# EAGLE board pcb l4 v26 (EAGLE 9.7.0)
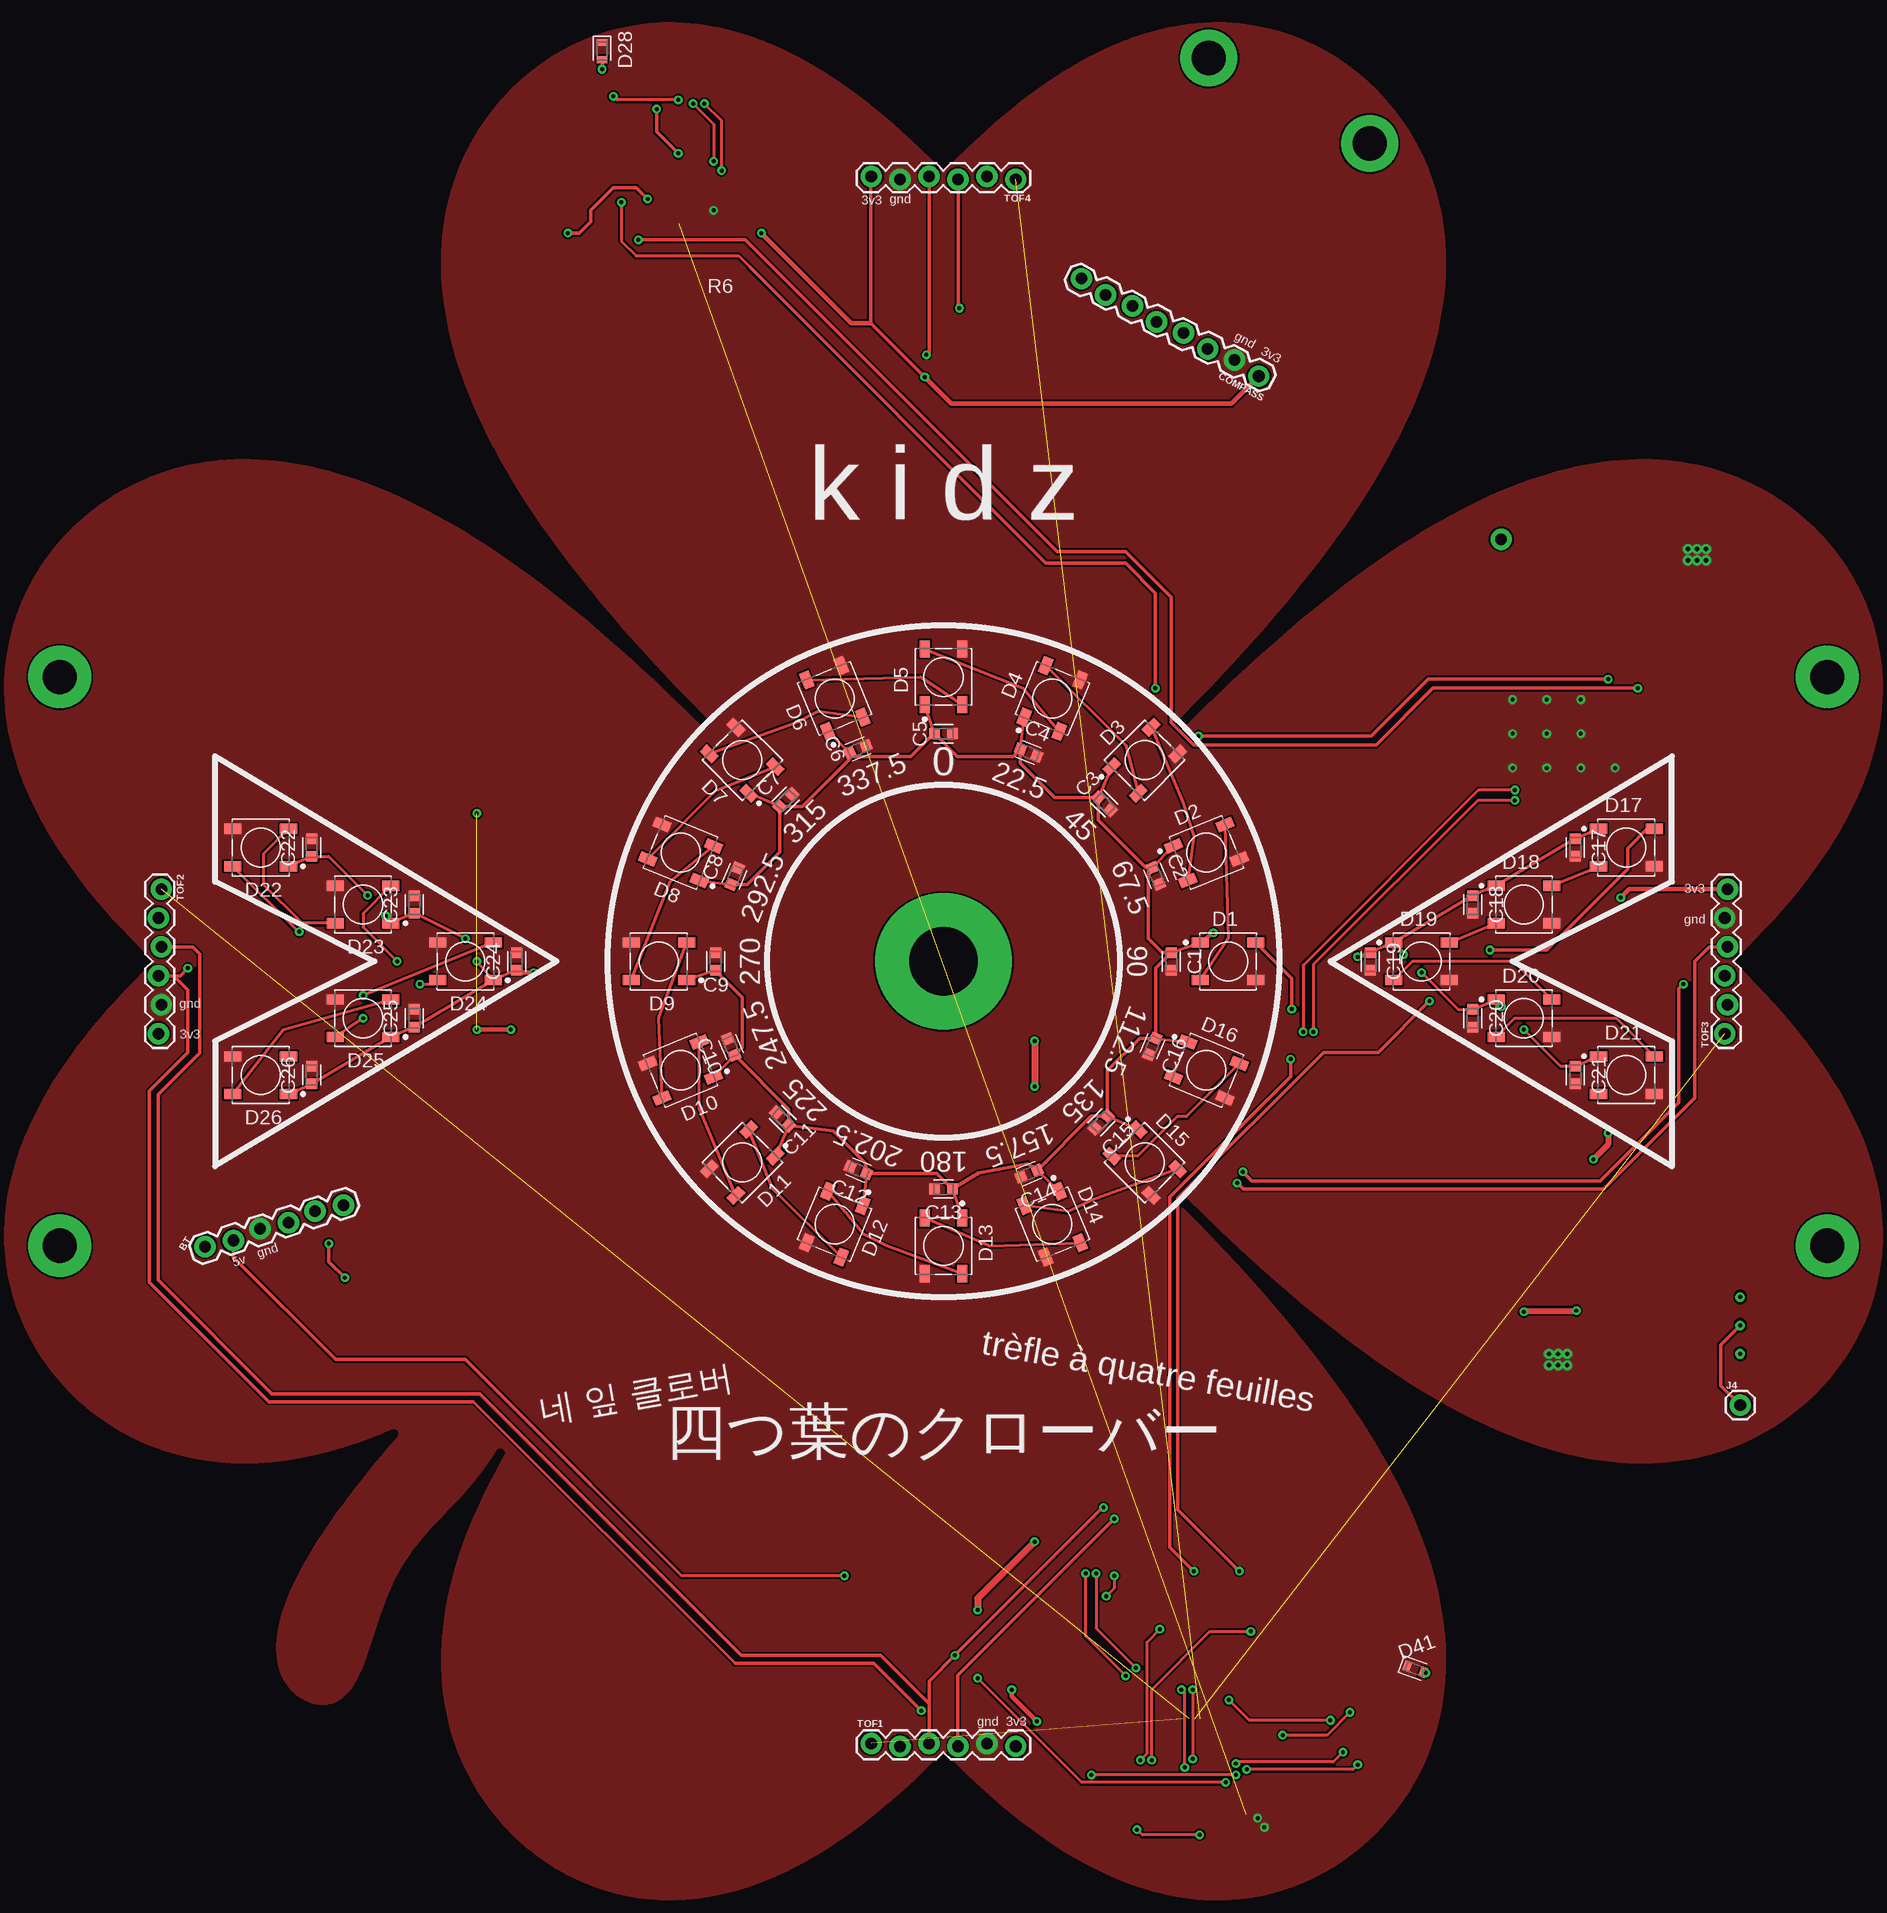
[diagram p0: board, top side]
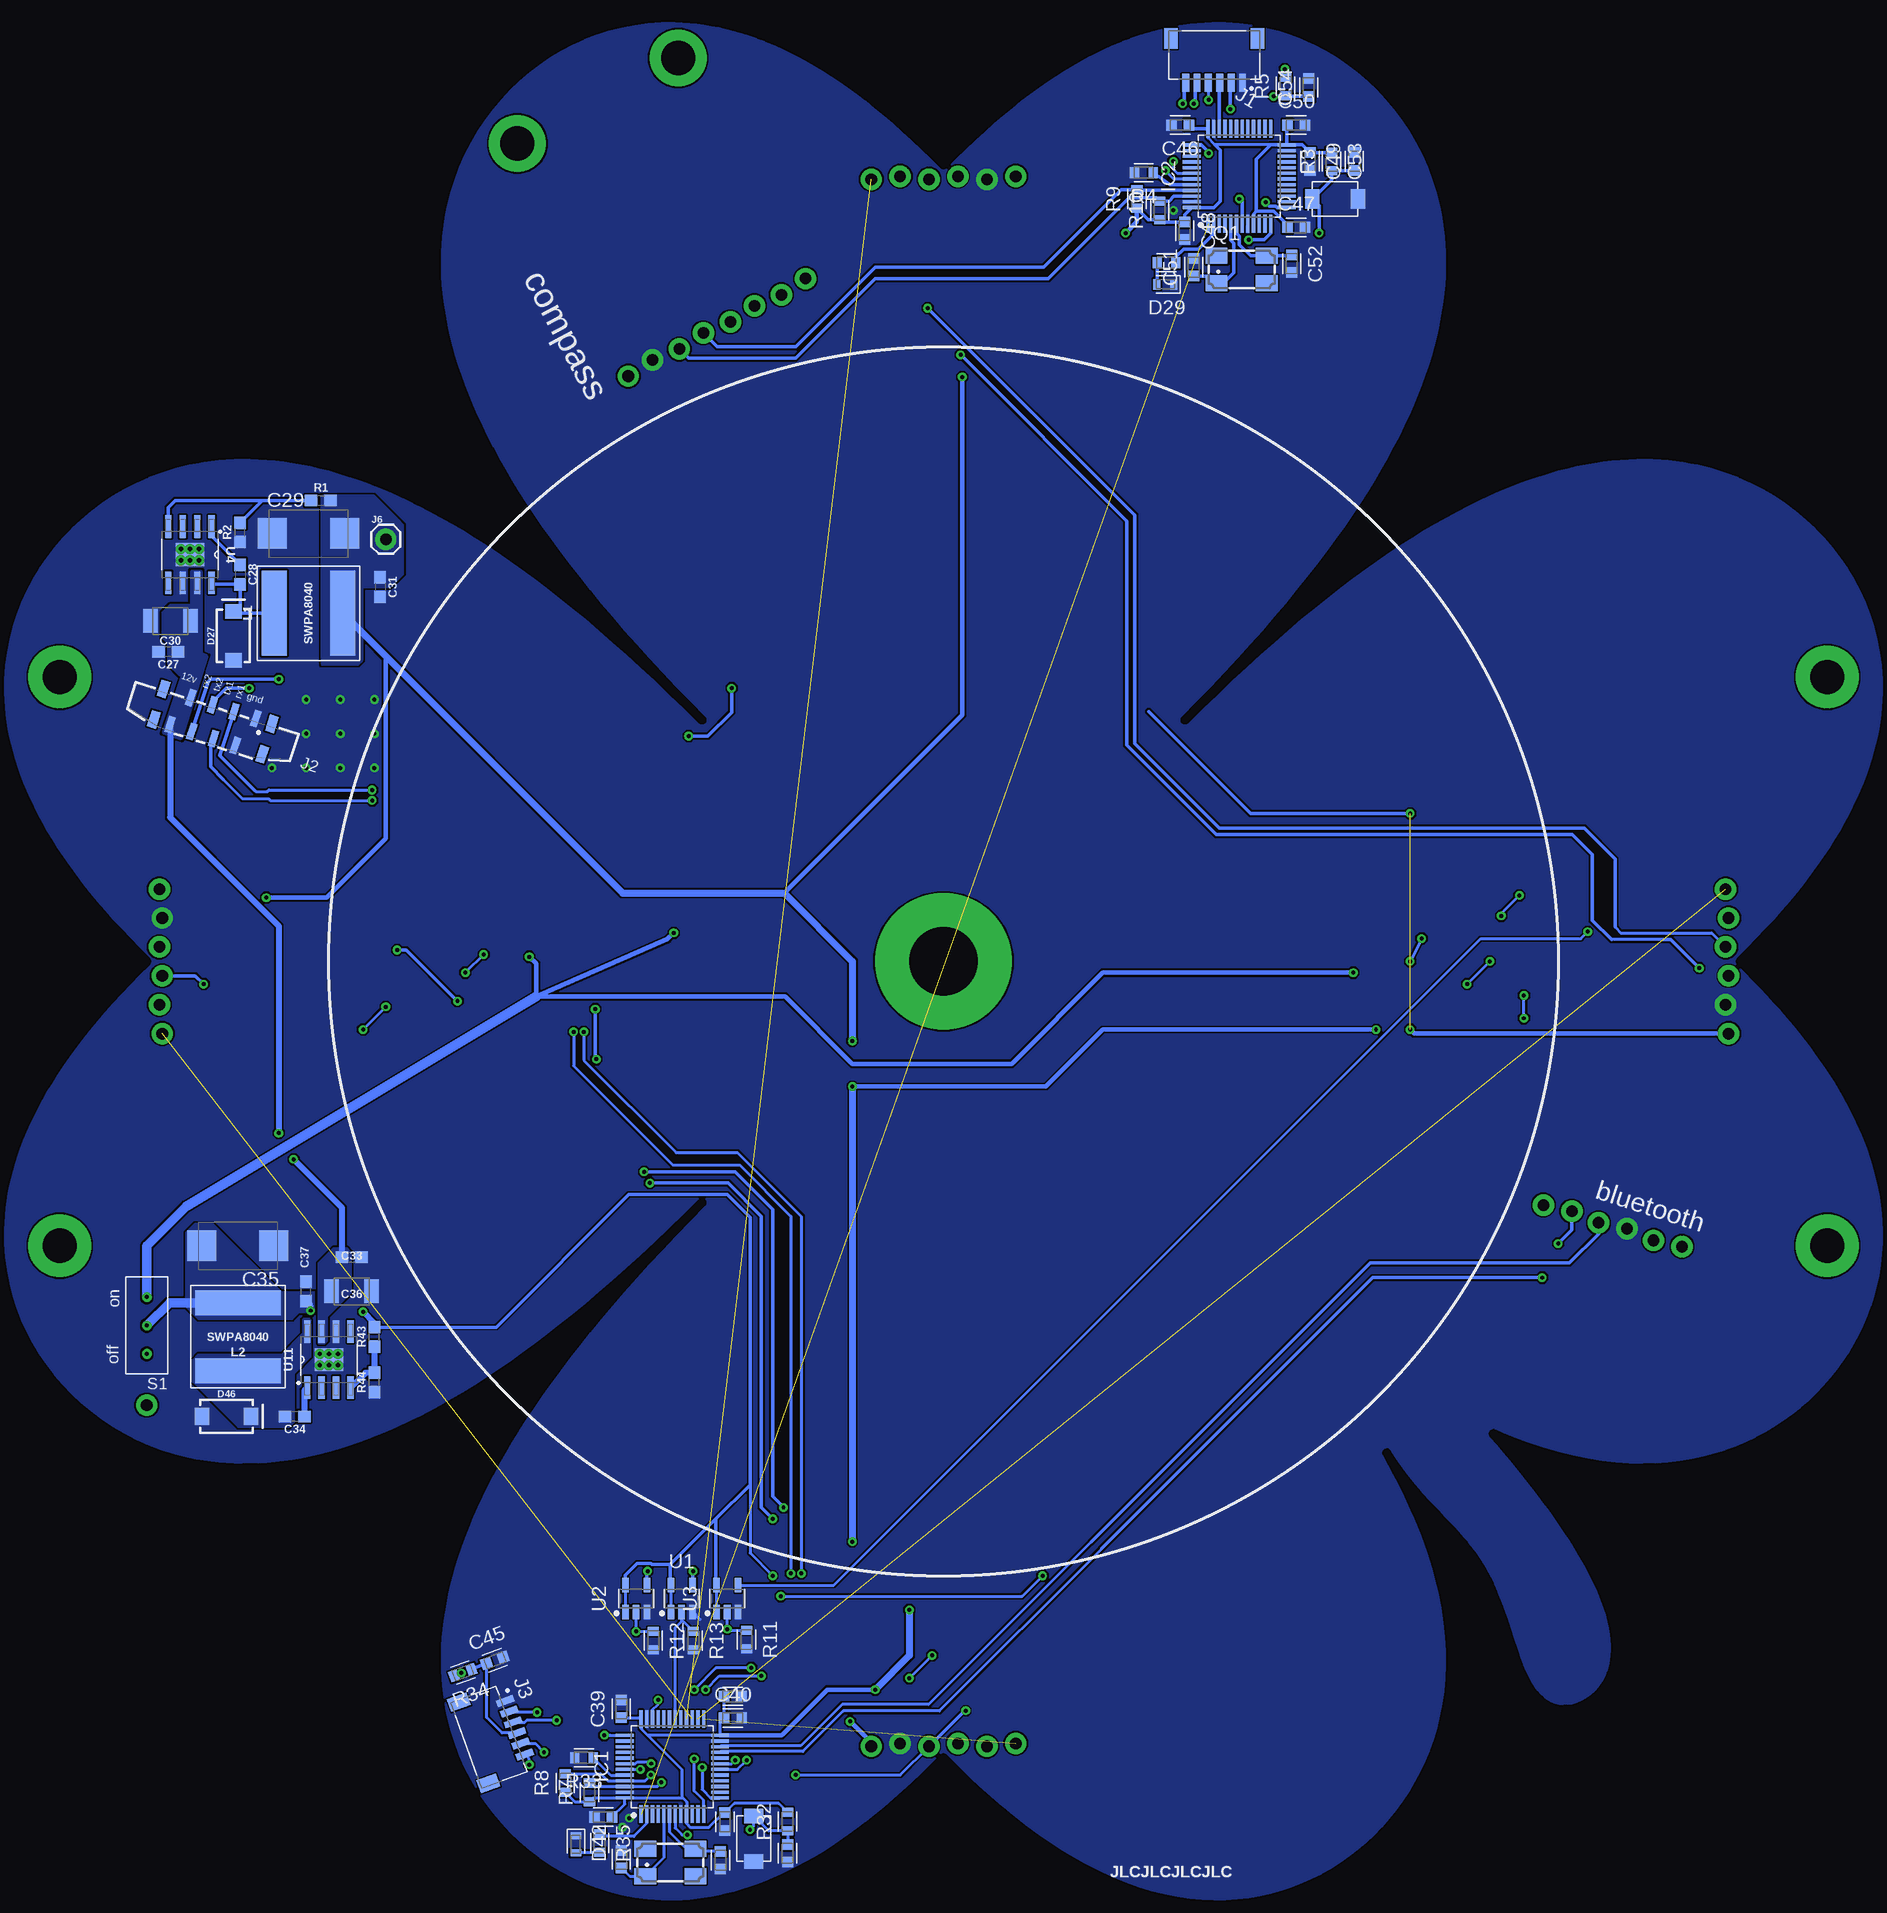
[diagram p1: board, bottom side, seen from below]

No outline drawn. Coordinates in mm, seen from the top.
Copper layers (1*16): Top / Bottom
Stack-up Default Layer Stack: Top User Defined 0.035mm / Dielectric-1 User Defined 1.5mm / Bottom User Defined 0.035mm
Design rules: minimum copper width 6mil, minimum drill size 0.35mm, copper clearance wire_polygon to wire_polygon 6mil, copper clearance wire_polygon to pad_smd 6mil, copper clearance wire_polygon to via 6mil, copper clearance pad_smd to pad_smd 6mil, copper clearance pad_smd to via 6mil, copper clearance via to via 6mil, copper clearance smd to pad (same net) 6mil, copper clearance smd to via (same net) 6mil, copper clearance smd to smd (same net) 6mil, dimension clearance 0.35mm, restrict clearance 0mil, drill distance 6mil, keepout clearance 0mil

## Footprints (pad centres in the part's own frame; a part is rotated, then mirrored left to right if it is on the bottom)
1X06_LOCK = drill 1.016 pad 1.88: 1 0,0; 2 2.54,-0.254; 3 5.08,0; 4 7.62,-0.254; 5 10.16,0; 6 12.7,-0.254
CAPC1608X85 = smd 0.921 x 0.97: 1 -0.775,0; 2 0.775,0
C0603 = smd 1.1 x 1: 1 -0.85,0; 2 0.85,0
D/7343-31R = smd 2.55 x 2.7: + 3.175,0; - -3.175,0
C1210 = smd 1.27 x 2.06: 1 -1.755,0; 2 1.755,0
1X08_LOCK = drill 1.016 pad 1.88: 1 0,0.127; 2 2.54,-0.127; 3 5.08,0.127; 4 7.62,-0.127; 5 10.16,0.127; 6 12.7,-0.127; 7 15.24,0.127; 8 17.78,-0.127
WS2812B = smd 1.5 x 0.9: 1 -2.45,1.65; 2 -2.45,-1.65; 3 2.45,-1.65; 4 2.45,1.65
SMA-DIODE = smd 1.27 x 1.47: A -2.15,0; C 2.15,0
LEDC1608X35N_FLAT-G = smd 0.612 x 0.912: A 0.75,0; C -0.75,0
QFP50P900X900X160-48N = smd 1.559 x 0.28: 1 -4.178,2.75; 2 -4.178,2.25; 3 -4.178,1.75; 4 -4.178,1.25; 5 -4.178,0.75; 6 -4.178,0.25; 7 -4.178,-0.25; 8 -4.178,-0.75; 9 -4.178,-1.25; 10 -4.178,-1.75; 11 -4.178,-2.25; 12 -4.178,-2.75; 25 4.178,-2.75; 26 4.178,-2.25; 27 4.178,-1.75; 28 4.178,-1.25; 29 4.178,-0.75; 30 4.178,-0.25; 31 4.178,0.25; 32 4.178,0.75; 33 4.178,1.25; 34 4.178,1.75; 35 4.178,2.25; 36 4.178,2.75 | smd 0.28 x 1.559: 13 -2.75,-4.178; 14 -2.25,-4.178; 15 -1.75,-4.178; 16 -1.25,-4.178; 17 -0.75,-4.178; 18 -0.25,-4.178; 19 0.25,-4.178; 20 0.75,-4.178; 21 1.25,-4.178; 22 1.75,-4.178; 23 2.25,-4.178; 24 2.75,-4.178; 37 2.75,4.178; 38 2.25,4.178; 39 1.75,4.178; 40 1.25,4.178; 41 0.75,4.178; 42 0.25,4.178; 43 -0.25,4.178; 44 -0.75,4.178; 45 -1.25,4.178; 46 -1.75,4.178; 47 -2.25,4.178; 48 -2.75,4.178
JST_SM06B-SRSS-TB(LF)(SN) = smd 0.6 x 1.55: 1 -2.5,0; 2 -1.5,0; 3 -0.5,0; 4 0.5,0; 5 1.5,0; 6 2.5,0 | smd 1.2 x 1.8: S1 -3.8,-3.875; S2 3.8,-3.875
686108183822 = smd 0.6 x 1.5: 1 -3.5,-1.8; 2 -2.5,1; 3 -1.5,-1.8; 4 -0.5,1; 5 0.5,-1.8; 6 1.5,1; 7 2.5,-1.8; 8 3.5,1 | smd 0.8 x 1.5: Z1 -5,-1.8; Z2 -5,1; Z3 5,-1.8; Z4 5,1
1X01 = drill 1.016 pad 1.88: 1 0,0
SWPA8040 = smd 2.2 x 7.5: P1 -3,0; P2 3,0
CTS406 = smd 1.9 x 1.4: 1 -2.2,-1.2; 2 2.2,-1.2; 3 2.2,1.2; 4 -2.2,1.2
R0603 = smd 1.1 x 1: 1 -0.85,0; 2 0.85,0
RESC1608X60 = smd 0.799 x 0.974: 1 -0.815,0; 2 0.815,0
SWITCH-TH = drill 0.33 slot 0.53: P$1 -2.5,0; P$2 0,0; P$3 2.5,0
SOT23-5 = smd 1.267 x 0.577: 1 -1.175,0.95; 2 -1.175,0; 3 -1.175,-0.95; 4 1.175,-0.95; 5 1.175,0.95
POWERPAD-SOIC-8 = smd 1.981 x 0.559: 1 -2.464,1.905; 2 -2.464,0.635; 3 -2.464,-0.635; 4 -2.464,-1.905; 5 2.464,-1.905; 6 2.464,-0.635; 7 2.464,0.635; 8 2.464,1.905 | smd 2.007 x 2.489: 9 0,0 | drill 0.381: P$1 -0.5,0.8; P$2 0.5,0.8; P$3 -0.5,0; P$4 0.5,0; P$5 -0.5,-0.8; P$6 0.5,-0.8
SMOL_TACTILE_3X4MM = smd 1.27 x 1.676: P$1 2,0; P$2 -2,0

## Placement (x,y rotation side)
BT  [1X06_LOCK]  -64.88,-25.06 17.8 top
C1  0.1 uf  [CAPC1608X85]  20,0 270 top
C2  0.1 uf  [CAPC1608X85]  18.65,7.52 292.5 top
C3  0.1 uf  [CAPC1608X85]  14.14,13.86 315 top
C4  0.1 uf  [CAPC1608X85]  7.48,18.35 337.5 top
C5  0.1 uf  [CAPC1608X85]  0,20 0 top
C6  0.1 uf  [CAPC1608X85]  -7.52,18.65 22.5 top
C7  0.1 uf  [CAPC1608X85]  -13.86,14.14 45 top
C8  0.1 uf  [CAPC1608X85]  -18.35,7.48 67.5 top
C9  0.1 uf  [CAPC1608X85]  -20,0 90 top
C10  0.1 uf  [CAPC1608X85]  -18.65,-7.52 112.5 top
C11  0.1 uf  [CAPC1608X85]  -14.14,-13.86 135 top
C12  0.1 uf  [CAPC1608X85]  -7.48,-18.35 157.5 top
C13  0.1 uf  [CAPC1608X85]  0,-20 180 top
C14  0.1 uf  [CAPC1608X85]  7.52,-18.65 202.5 top
C15  0.1 uf  [CAPC1608X85]  13.86,-14.14 225 top
C16  0.1 uf  [CAPC1608X85]  18.35,-7.48 247.5 top
C17  0.1 uf  [CAPC1608X85]  55.5,10 270 top
C18  0.1 uf  [CAPC1608X85]  46.5,5 270 top
C19  0.1 uf  [CAPC1608X85]  37.5,0 270 top
C20  0.1 uf  [CAPC1608X85]  46.5,-5 270 top
C21  0.1 uf  [CAPC1608X85]  55.5,-10 270 top
C22  0.1 uf  [CAPC1608X85]  -55.5,10 90 top
C23  0.1 uf  [CAPC1608X85]  -46.5,5 90 top
C24  0.1 uf  [CAPC1608X85]  -37.5,0 90 top
C25  0.1 uf  [CAPC1608X85]  -46.5,-5 90 top
C26  0.1 uf  [CAPC1608X85]  -55.5,-10 90 top
C27  4.7uF  [C0603]  68.1,27.2 180 bottom
C28  10.0nF  [C0603]  61.8,34 270 bottom
C29  220uF  [D/7343-31R]  55.8,37.6 0 bottom
C30  22.0uF  [C1210]  67.93,29.92 180 bottom
C31  0.1uF  [C0603]  49.5,32.9 270 bottom
C32  0.1 uf  [CAPC1608X85]  19.2,-75.6 270 bottom
C33  4.7uF  [C0603]  52,-26 0 bottom
C34  10.0nF  [C0603]  57,-40 180 bottom
C35  220uF  [D/7343-31R]  62,-25 180 bottom
C36  22.0uF  [C1210]  52,-29 0 bottom
C37  0.1uF  [C0603]  56,-29 90 bottom
C38  0.1 uf  [CAPC1608X85]  29.9,-75.2 180 bottom
C39  0.1 uf  [CAPC1608X85]  28.3,-65.7 90 bottom
C40  0.1 uf  [CAPC1608X85]  18.5,-66.5 0 bottom
C41  4.7 uf  [CAPC1608X85]  18.5,-64.6 0 bottom
C42  20 pf  [CAPC1608X85]  28.3,-78.9 90 bottom
C43  20pf  [CAPC1608X85]  19.6,-79 270 bottom
C44  0.1uf  [CAPC1608X85]  13.7,-78.4 90 bottom
C45  0.1 uF  [CAPC1608X85]  39.42,-61.43 20 bottom
C46  0.1 uF  [CAPC1608X85]  -20.8,73.5 180 bottom
C47  0.1 uF  [CAPC1608X85]  -31,64.5 0 bottom
C48  0.1 uF  [CAPC1608X85]  -21.2,64.2 270 bottom
C49  0.1 uF  [CAPC1608X85]  -32.2,70.3 270 bottom
C50  4.7 uF  [CAPC1608X85]  -31,73.5 0 bottom
C51  20 pF  [CAPC1608X85]  -22,61 90 bottom
C52  20 pF  [CAPC1608X85]  -30.6,61.3 270 bottom
C53  0.1 uF  [CAPC1608X85]  -36.08,70.3 270 bottom
C54  0.1 uF  [CAPC1608X85]  -32.1,76.8 90 bottom
COMPASS  [1X08_LOCK]  27.76,51.54 152 top
D1  WS2812B  [WS2812B]  25,0 0 top
D2  WS2812B  [WS2812B]  23.1,9.57 22.5 top
D3  WS2812B  [WS2812B]  17.68,17.68 45 top
D4  WS2812B  [WS2812B]  9.57,23.1 67.5 top
D5  WS2812B  [WS2812B]  0,25 90 top
D6  WS2812B  [WS2812B]  -9.57,23.1 112.5 top
D7  WS2812B  [WS2812B]  -17.68,17.68 135 top
D8  WS2812B  [WS2812B]  -23.1,9.57 157.5 top
D9  WS2812B  [WS2812B]  -25,0 180 top
D10  WS2812B  [WS2812B]  -23.1,-9.57 202.5 top
D11  WS2812B  [WS2812B]  -17.68,-17.68 225 top
D12  WS2812B  [WS2812B]  -9.57,-23.1 247.5 top
D13  WS2812B  [WS2812B]  0,-25 270 top
D14  WS2812B  [WS2812B]  9.57,-23.1 292.5 top
D15  WS2812B  [WS2812B]  17.68,-17.68 315 top
D16  WS2812B  [WS2812B]  23.1,-9.57 337.5 top
D17  WS2812B  [WS2812B]  60,10 0 top
D18  WS2812B  [WS2812B]  51,5 0 top
D19  WS2812B  [WS2812B]  42,0 0 top
D20  WS2812B  [WS2812B]  51,-5 0 top
D21  WS2812B  [WS2812B]  60,-10 0 top
D22  WS2812B  [WS2812B]  -60,10 180 top
D23  WS2812B  [WS2812B]  -51,5 180 top
D24  WS2812B  [WS2812B]  -42,0 180 top
D25  WS2812B  [WS2812B]  -51,-5 180 top
D26  WS2812B  [WS2812B]  -60,-10 180 top
D27  3A/40V/500mV  [SMA-DIODE]  62.38,28.6 90 bottom
D28  [LEDC1608X35N_FLAT-G]  -30,80 270 top
D29  [LEDC1608X35N_FLAT-G]  -19.5,59.5 180 bottom
D41  [LEDC1608X35N_FLAT-G]  41.44,-62.2 340 top
D42  [LEDC1608X35N_FLAT-G]  32.3,-77.6 270 bottom
D46  3A/40V/500mV  [SMA-DIODE]  63,-40 0 bottom
IC1  [QFP50P900X900X160-48N]  23.82,-70.77 90 bottom
IC2  [QFP50P900X900X160-48N]  -25.99,69 90 bottom
J1  [JST_SM06B-SRSS-TB(LF)(SN)]  -23.78,77.21 180 bottom
J2  686108183822  [686108183822]  64.31,20.69 162.2 bottom
J3  [JST_SM06B-SRSS-TB(LF)(SN)]  37.65,-67.34 290 bottom
J4  [1X01]  70,-39 0 top
J6  [1X01]  49,37.1 0 bottom
L1  SWPA8040/10uH  [SWPA8040]  55.8,30.6 0 bottom
L2  SWPA8040/10uH  [SWPA8040]  62,-33 90 bottom
Q1  8Mhz  [CTS406]  -26.2,60.8 0 bottom
Q26  8mhz  [CTS406]  24,-79.2 0 bottom
R1  10k  [R0603]  54.7,40.5 0 bottom
R2  3.24k  [R0603]  61.8,37.7 90 bottom
R3  10k  [RESC1608X60]  -34.1,70.3 90 bottom
R4  10k  [RESC1608X60]  -17.6,69.3 180 bottom
R5  .39  [RESC1608X60]  -30.06,76.9 90 bottom
R6  .39  [RESC1608X60]  -19.6,61.4 180 bottom
R7  10k  [RESC1608X60]  31.1,-73.03 90 bottom
R8  10k  [RESC1608X60]  33.23,-72.2 90 bottom
R9  10k  [RESC1608X60]  -17,67 90 bottom
R10  10k  [RESC1608X60]  -19,66 90 bottom
R11  10k  [RESC1608X60]  17.3,-59.6 270 bottom
R12  10k  [RESC1608X60]  25.5,-59.7 270 bottom
R13  10k  [RESC1608X60]  22,-59.7 270 bottom
R32  10k  [RESC1608X60]  13.7,-75.6 90 bottom
R33  10k  [RESC1608X60]  31.58,-70 180 bottom
R34  .39  [RESC1608X60]  42.23,-62.51 200 bottom
R35  .39  [RESC1608X60]  30.2,-77.5 270 bottom
R43  10k  [R0603]  50,-33 90 bottom
R44  5.9k  [R0603]  50,-37 90 bottom
S1  SPDT-SLIDE-SWITCHSWITCH-TH  [SWITCH-TH]  70,-32 90 bottom
TOF1  [1X06_LOCK]  -6.35,-68.73 0 top
TOF2  [1X06_LOCK]  -68.72,6.35 270 top
TOF3  [1X06_LOCK]  68.64,-6.35 90 top
TOF4  [1X06_LOCK]  6.35,68.73 180 top
U1  SN74AHCT1G08  [SOT23-5]  23,-56 90 bottom
U2  SN74AHCT1G08  [SOT23-5]  27,-56 90 bottom
U3  SN74AHCT1G08  [SOT23-5]  19,-56 90 bottom
U4  TPS5430  [POWERPAD-SOIC-8]  66.2,35.74 270 bottom
U11  TPS5430  [POWERPAD-SOIC-8]  54,-35 90 bottom
U$1  [SMOL_TACTILE_3X4MM]  16.68,-77.1 270 bottom
U$2  [SMOL_TACTILE_3X4MM]  -34.4,67 0 bottom

## Library data of the parts
BT COMPASS J4 J6 TOF1-TOF4 = SparkFun-Connectors
C1-C26 C32 C38-C54 = Capacitor; CATEGORY: Capacitor
C27 C28 C30 C31 C33 C34 C36 C37 L1 L2 R1 R2 R43 R44 U4 U11 = JH
C29 C35 = rcl; SPICEPREFIX: C
D1-D26 = LED; CATEGORY: LED; COLOR: RGB; DESCRIPTION: LED integrated light source; MANUFACTURER: Worldsemi; MPN: WS2812B; OPERATING_TEMP: -25 ℃ to +80℃(TJ); PART_STATUS: Active; SUB_CATEGORY: RGB
D27 D46 = SparkFun-DiscreteSemi; PROD_ID: DIO-09886
D28 D29 D41 D42 = LED; CATEGORY: LED; COLOR: GREEN; DESCRIPTION: CHIP LED FLAT; SUB-CATEGORY: CHIP; TYPE: FLAT_TOP
IC1 IC2 = IC_Embedded; CATEGORY: IC_Embedded; MANUFACTURER: ST Microelectronics; MPN: STM32F103C6T7A; OPERATING_TEMP: -40 to 105 °C; PART_STATUS: Active; SUB-CATEGORY: Microcontroller; THERMALLOSS: 0.44W
J1 J3 = SM06B-SRSS-TB_LF__SN_; MANUFACTURER: JST; STANDARD: Manufacturer Recommendation
J2 = Wurth_Connectors_WR-FPC; CONTACT-RESISTANCE: 30mOhm; DATASHEET-URL: https://www.we-online.com/catalog/datasheet/686108183822.pdf; IR: 1A; L: 14.8mm; MATE-WITH: WR-FFC 1.00 mm Flat Flexible Cable Type 1 (Contacts on same side)/ Type 2 (Contacts opposite); PACKAGING: Tape and Reel; PART-NUMBER: 686108183822; PINS: 8; PITCH: 1mm; TYPE: Vertical; WORKING-VOLTAGE: 125V(AC)
Q1 Q26 = crystal; OC_FARNELL: unknown; OC_NEWARK: unknown
R3-R13 R32-R35 = Resistor; CATEGORY: Resistor; SUB-CATEGORY: Fixed
S1 U1-U3 = i want to make my own parts
U$1 U$2 = smolswitch

## Nets
+3.3V: C29.+ C31.1 C32.1 C38.1 C39.1 C40.1 C41.1 C46.1 C47.1 C48.1 C49.1 C50.1 COMPASS.1 IC1.9 IC1.24 IC1.36 IC1.48 IC2.9 IC2.24 IC2.36 IC2.48 J6.1 L1.P2 R1.2 R3.2 R7.1 R8.1 R9.1 R10.1 R32.2 TOF1.6 TOF2.6 TOF3.6 TOF4.6
+5V: BT.2 C35.+ C37.1 J4.1 L2.P2 R43.2 S1.P$2 U1.1 U1.5 U2.1 U2.5 U3.1 U3.5
+12V: C27.1 C30.1 C33.1 C36.1 J2.7 J2.8 U4.7 U11.7
BOOT: IC1.44 R33.1
BOOT_2: IC2.44 R4.1
BT_RX: BT.5 IC1.21
BT_TX: BT.4 IC1.22
EYES1: IC1.18 R11.1 U3.2
EYES2: IC1.19 R12.1 U2.2
GND: BT.3 C1.2 C2.2 C3.2 C4.2 C5.2 C6.2 C7.2 C8.2 C9.2 C10.2 C11.2 C12.2 C13.2 C14.2 C15.2 C16.2 C17.2 C18.2 C19.2 C20.2 C21.2 C22.2 C23.2 C24.2 C25.2 C26.2 C27.2 C29.- C30.2 C31.2 C32.2 C33.2 C35.- C36.2 C37.2 C38.2 C39.2 C40.2 C41.2 C42.2 C43.2 C44.1 C45.2 C46.2 C47.2 C48.2 C49.2 C50.2 C51.2 C52.2 C53.1 C54.2 COMPASS.2 D1.3 D2.3 D3.3 D4.3 D5.3 D6.3 D7.3 D8.3 D9.3 D10.3 D11.3 D12.3 D13.3 D14.3 D15.3 D16.3 D17.3 D18.3 D19.3 D20.3 D21.3 D22.3 D23.3 D24.3 D25.3 D26.3 D27.A D28.C D29.C D41.C D42.C D46.A IC1.8 IC1.23 IC1.35 IC1.47 IC2.8 IC2.23 IC2.35 IC2.47 J1.1 J2.1 J2.2 J3.1 R2.1 R4.2 R11.2 R12.2 R13.2 R33.2 R44.1 TOF1.5 TOF2.5 TOF3.5 TOF4.5 U1.3 U2.3 U3.3 U4.6 U4.9 U4.P$1 U4.P$2 U4.P$3 U4.P$4 U4.P$5 U4.P$6 U11.6 U11.9 U11.P$1 U11.P$2 U11.P$3 U11.P$4 U11.P$5 U11.P$6 U$1.P$1 U$2.P$1
L4_STM1_RX: IC1.13 J2.3
L4_STM1_TX: IC1.12 J2.4
L4_STM2_RX: IC2.13 J2.6
L4_STM2_TX: IC2.12 J2.5
N$6: C28.2 D27.C L1.P1 U4.8
N$7: D1.2 D2.4
N$8: D2.2 D3.4
N$9: D3.2 D4.4
N$10: D9.2 D10.4
N$11: D10.2 D11.4
N$12: D1.4 U1.4
N$13: D11.2 D12.4
N$14: D15.2 D16.4
N$15: D14.2 D15.4
N$16: D13.2 D14.4
N$17: D5.2 D6.4
N$18: D6.2 D7.4
N$19: D7.2 D8.4
N$20: D8.2 D9.4
N$21: D12.2 D13.4
N$22: D4.2 D5.4
N$23: D20.2 D21.4
N$24: D19.2 D20.4
N$25: D18.2 D19.4
N$26: D17.2 D18.4
N$27: D22.2 D23.4
N$28: D23.2 D24.4
N$29: D24.2 D25.4
N$30: D25.2 D26.4
N$31: D22.4 U3.4
N$32: D17.4 U2.4
N$33: R1.1 R2.2 U4.4
N$34: C28.1 U4.1
N$35: D28.A R5.2
N$36: D29.A R6.2
N$45: C34.2 D46.C L2.P1 U11.8
N$46: D41.A R34.2
N$52: D42.A R35.2
N$96: R43.1 R44.2 U11.4
N$97: C34.1 U11.1
O_IN: C42.1 IC1.5 Q26.1
O_IN_2: C51.1 IC2.5 Q1.1
O_OUT: C43.1 IC1.6 Q26.3
O_OUT_2: C52.1 IC2.6 Q1.3
PC13: IC1.2 R35.1
PC13_2: IC2.2 R6.1
RGB_5V: C1.1 C2.1 C3.1 C4.1 C5.1 C6.1 C7.1 C8.1 C9.1 C10.1 C11.1 C12.1 C13.1 C14.1 C15.1 C16.1 C17.1 C18.1 C19.1 C20.1 C21.1 C22.1 C23.1 C24.1 C25.1 C26.1 D1.1 D2.1 D3.1 D4.1 D5.1 D6.1 D7.1 D8.1 D9.1 D10.1 D11.1 D12.1 D13.1 D14.1 D15.1 D16.1 D17.1 D18.1 D19.1 D20.1 D21.1 D22.1 D23.1 D24.1 D25.1 D26.1 S1.P$3
RING: IC1.30 R13.1 U1.2
RST: C44.2 IC1.7 R32.1 U$1.P$2
RST_2: C53.2 IC2.7 R3.1 U$2.P$2
RX1: IC1.43 J3.6
RX1_2: IC2.43 J1.6
SCL1: COMPASS.4 IC2.45 R9.2
SCL2: IC1.45 R8.2 TOF1.4 TOF2.4 TOF3.4 TOF4.4
SDA1: COMPASS.3 IC2.46 R10.2
SDA2: IC1.46 R7.2 TOF1.3 TOF2.3 TOF3.3 TOF4.3
SWCLK: IC1.37 J3.2
SWCLK_2: IC2.37 J1.2
SWD_3V3_1: C45.1 J3.4 R34.1
SWD_3V3_2: C54.1 J1.4 R5.1
SWDIO: IC1.34 J3.3
SWDIO_2: IC2.34 J1.3
TX1: IC1.42 J3.5
TX1_2: IC2.42 J1.5
VBAT: IC1.1 IC2.1
XSHUT1: IC1.25 TOF1.1
XSHUT2: IC1.26 TOF2.1
XSHUT3: IC1.27 TOF3.1
XSHUT4: IC1.28 TOF4.1

## Tracks (layer width: path | path; a pad name or v marks a point on that pad's centre or on a via)
+3.3V  (via drill 0.35)  (1 unrouted)
  Top 0.305: v-1.65,51.35 -6.4,56.1 -6.4,68.93 TOF4.6
  Top 0.406: v59.5,5.6 60.25,6.35 TOF3.6 | v8.2,-66.8 6,-64.6 v6,-64 | v-41,-6 v-38,-6 | COMPASS.1 25.27,49 0.7,49 v-1.65,51.35 | -6.4,56.1 -8.1,56.1 v-16,64
  Top 0.61: v8,-7 v8,-11 | v8,-51 3,-56 v3,-57
  Bottom 0.254: R8.1 32.4,-73.84 R7.1 30.77,-73.52 IC1.48 | C38.1 28,-74.08 IC1.48 | C39.1 26.69,-66.47 IC1.36 26.57,-67.43 25.98,-68.02 | 25.98,-68.02 IC1.24 19.64,-66.87 C40.1 C41.1 | R32.2 14.48,-74 18.38,-74 C32.1 19.32,-74.83 20.61,-76.11 22.23,-76.11 22.57,-75.76 IC1.9 22.57,-73.87 22.93,-73.52 23,-73.52 | IC1.48 23,-73.52 | 25.98,-68.02 23,-71 23,-73.52 | IC2.24 -23.85,71.75 -23.24,72.36 IC2.36
  Bottom 0.305: IC2.24 -30.17,73.44 C50.1 | IC2.24 -31.52,71.75 C49.1 -34.06,71.08 R3.2 | R9.1 -18,65.19 R10.1 -19.21,64.97 C48.1 -21.2,65.64 IC2.48 -23.75,66.25 -24.3,66.8 -24.3,71.3 -23.85,71.75 | IC2.36 -21.9,73.18 C46.1 | C47.1 -30.23,64.69 -29.01,65.91 -27.47,65.91 | IC2.9 -27.24,65.67 -27.47,65.91 | R1.2 53.8,40.5 | 52.9,37.6 C29.+ 52.62,36.88 | 52.62,30.77 L1.P2 | -18.05,21.95 -27,13 v-41,13 | IC2.24 -28.75,71.75 -27.47,70.47 -27.47,65.91
  Bottom 0.406: L1.P2 49,26.8 49,10.8 54.2,5.6 v59.5,5.6 | IC1.24 14.22,-68.02 10.2,-64 v6,-64 | TOF1.6 6.35,-68.65 v8.2,-66.8 | TOF2.6 -41.35,-6.35 v-41,-6 | v-38,-6 -14,-6 -9,-11 v8,-11 | 14,6 -1.65,21.65 v-1.65,51.35 | v-16,64 -17,65 R9.1
  Bottom 0.61: L1.P2 28.2,6 14,6 8,0 v8,-7 | v8,-11 v8,-51 | v3,-57 3,-61 v6,-64
  pour Bottom (no thermals): 54.7,41 54.7,30.47 47.89,38.89 50,41
  pour Bottom (no thermals): 54.7,32.2 54.7,26 51.4,26 51,26.4 51,32.8 48.6,32.8 47.4,34 47.4,38.4 47.95,38.95
+5V  (via drill 0.35)
  Top 0.254: v15,-54 15,-55.1 v14.3,-55.8 | v-8.7,-54 -23,-54 -31,-46
  Top 0.305: S1.P$2 68.3,-33.7 68.3,-37.3 J4.1 | -31,-46 -42,-35 -53.4,-35 -62.39,-26.01 BT.2
  Top 0.508: v51,-30.8 51.1,-30.7 v55.6,-30.7
  Bottom 0.254: U3.5 U3.1 | U1.5 U1.1 | U2.1 27.95,-55 U2.5 | 17,-46 17,-52 v15,-54 | v14.3,-55.8 -6.9,-55.8 v-8.7,-54
  Bottom 0.305: R43.2 39.3,-32.15 27.65,-20.5 19,-20.5 17,-22.5 17,-46 20,-49 | 20,-49 20,-54.77 U3.5 | 20,-49 24,-53 | 24,-53 24,-54.77 U1.5 | 27.95,-55 27.95,-53.95 26.92,-52.92 25.72,-52.92 25.63,-53 24,-53
  Bottom 0.508: v55.6,-30.7 55.6,-30.25 C37.1 | R43.2 50,-31.8 v51,-30.8
  Bottom 0.813: L2.P2 68,-30 S1.P$2
  pour Bottom (no thermals): 65.8,-23 66.6,-23.8 66.6,-30.4 65.49,-31.51 57.18,-31.51 56.58,-30.91 55.42,-30.91 55.22,-30.71 55.22,-29.04 55.27,-28.99 58.2,-28.99 64.19,-23
+12V  (via drill 0.35)
  Top 0.508: v58.4,-15.1 58.4,-16.1 v57.1,-17.4
  Bottom 0.305: 66.47,30.57 66.47,30.62 66.53,30.55 | 65.57,32.52 U4.7
  Bottom 0.508: J2.8 67.95,12.65 58.4,3.1 v58.4,-15.1 | v57.1,-17.4 52.85,-21.65 C33.1
  pour Bottom (no thermals): 54.96,-26.49 54.96,-33.62 54.92,-33.66 54.35,-33.66 54.08,-33.39 54.08,-31.23 52,-29.15 52,-25.55 52.42,-25.13 53.6,-25.13
  pour Bottom (no thermals): 64.56,26.92 66.9,19.4 68.7,20 66.2,27.5
  pour Bottom (no thermals): 65.1,27.1 65.1,34.4 66.2,34.4 66.2,31.4 68,31.4 68.7,30.7 68.7,28.4 68.2,27.9 68.2,26.1 67.1,25 66.8,25.3 65.1,25.3 65,25.4 65,27.1
BOOT
  Bottom 0.254: IC1.44 29.25,-71.52 R33.1
BOOT_2
  Bottom 0.305: IC2.44 -19.93,68.25 R4.1
BT_RX  (via drill 0.35)
  Top 0.305: v-52.6,-27.8 -54,-26.4 v-54,-24.8
  Bottom 0.254: -13.9,-51.6 -13.9,-51.63 0.35,-65.88 8.8,-65.88 12.36,-69.44 19.56,-69.44 IC1.21
  Bottom 0.305: -13.9,-51.6 -37.7,-27.8 v-52.6,-27.8 | v-54,-24.8 -55.21,-23.59 BT.5
BT_TX
  Bottom 0.254: -13,-51 1.3,-65.3 8.9,-65.3 12.54,-68.94 19.56,-68.94 IC1.22
  Bottom 0.305: -13,-51 -37.5,-26.5 -55,-26.5 -57.55,-23.95 BT.4
EYES1  (via drill 0.35)
  Top 0.254: v17.3,-70.2 17.89,-69.61 17.89,-59.83 19,-58.73 v19,-58.7
  Bottom 0.254: IC1.18 18.12,-71.02 v17.3,-70.2 | U3.2 v19,-58.7 18.91,-58.78 R11.1
EYES2  (via drill 0.35)
  Top 0.254: v18.3,-70.2 18.3,-64 23.4,-58.9 v27,-58.9
  Bottom 0.254: IC1.19 18.62,-70.52 v18.3,-70.2 | U2.2 v27,-58.9 26.98,-58.88 R12.1
GND  (via drill 0.35)
  Bottom 0.305: U1.3 21.4,-57.83
  other vias: 27.6,-75.3 28.2,-76.1 -20.2,66 56,23 53,23 53,20 56,20 56,17 53,17 50,20 50,23 50,17 59,17
  pour Top (isolate 0.152, rank 6, no thermals): -70,95 56,95 98,53 98,-79 84,-93 -61,-93 -101,-53 -101,64
  pour Bottom (isolate 0.152, rank 6, no thermals): -74,85 61,85 94,52 94,-103 -58.81,-103 -97,-64.81 -97,62
L4_STM1_RX  (via drill 0.35)
  Top 0.254: v50.2,15.05 46.99,15.05 31.59,-0.35 v31.59,-6.2 | v21.2,-70.84 21.2,-64.3 v20.9,-64 | v16,-62.8 12.49,-59.29 v12.49,-53.8
  Bottom 0.254: IC1.13 19.66,-73.54 20.44,-73.54 21.2,-72.78 v21.2,-70.84 | 60.5,15 60.4,14.9 59.4,14.9 59.25,15.05 v50.2,15.05 | v31.59,-6.2 31.59,-8.71 23.5,-16.8 18.11,-16.8 12.49,-22.42 v12.49,-53.8 | v20.9,-64 19.7,-62.8 v16,-62.8
  Bottom 0.305: J2.3 63.6,18.1 60.5,15
L4_STM1_TX  (via drill 0.35)
  Top 0.254: v50.2,14.15 46.95,14.15 32.5,-0.3 v32.5,-6.2 | v13.4,-53.8 13.4,-58.6 v16.9,-62.1 | v21.9,-64 v21.9,-70.1
  Bottom 0.254: IC1.12 21.07,-73.73 21.9,-72.9 v21.9,-70.1 | 63.27,15.97 61.6,14.3 59.3,14.3 59.15,14.15 v50.2,14.15 | v32.5,-6.2 32.5,-9.19 23.78,-17.91 17.89,-17.91 13.4,-22.4 v13.4,-53.8 | v16.9,-62.1 20,-62.1 v21.9,-64
  Bottom 0.305: 63.27,15.97 64.4,17.1 64.4,19.12 64.14,19.39 J2.4
L4_STM2_RX  (via drill 0.35)
  Top 0.254: v-28.3,66.7 -28.3,63.3 -27,62 -18,62 -17,61
  Top 0.305: -17,61 9,35 16,35 18.62,32.38 v18.62,24 | v58.4,24.8 42.6,24.8 37.6,19.8 v22.4,19.8
  Bottom 0.305: v-28.3,66.7 -28.64,66.36 -29.2,66.36 -29.31,66.25 IC2.13 | J2.6 64.6,24.6 64.4,24.8 v58.4,24.8 | v22.4,19.8 20.7,19.8 18.62,21.88 v18.62,24
L4_STM2_TX  (via drill 0.35)
  Top 0.305: v-26.8,63.4 -17.4,63.4 10,36 16,36 20,32 20,21 22,19 38,19 43,24 v61,24
  Bottom 0.305: J2.5 64.24,22.76 63,24 v61,24 | v-26.8,63.4 -28.17,63.4 -28.74,63.97 IC2.12
N$1  (via drill 3 pad 5.5)
  other vias: -77.65,24.99
N$2  (via drill 3 pad 5.5)
  other vias: 77.65,24.99
N$3  (via drill 3 pad 5.5)
  other vias: -77.65,-24.99
N$4  (via drill 3 pad 5.5)
  other vias: 77.65,-24.99
N$5  (via drill 6 pad 12)
  other vias: 0,0
N$6
  Bottom 0.305: U4.8 64.17,33.15 C28.2 61.8,31.33 D27.C 62.23,30.6 L1.P1
N$7
  Top 0.254: D2.4 25,2 D1.2
N$8
  Top 0.254: D3.4 21,14 22,11 D2.2
N$9
  Top 0.254: D4.4 16,19 D3.2
N$10
  Top 0.254: D10.4 -25,-5 D9.2
N$11
  Top 0.254: D11.4 -21.46,-12.89 D10.2
N$12  (via drill 0.35)
  Top 0.305: v30.6,-4.2 30.6,-1.5 D1.4 | v22,-53.6 19.9,-51.5 19.9,-20.7 30.5,-10.1 v30.5,-8.6
  Bottom 0.305: U1.4 22.05,-53.65 v22,-53.6 | v30.5,-8.6 30.6,-8.5 v30.6,-4.2
N$13
  Top 0.254: D12.4 -15,-20 D11.2
N$14
  Top 0.254: D16.4 21.33,-13.64 20.53,-13.64 17.06,-17.11 D15.2
N$15
  Top 0.254: D15.4 13,-21 11,-22 D14.2
N$16
  Top 0.254: D14.4 4,-25 D13.2
N$17
  Top 0.254: D6.4 -2,25 D5.2
N$18
  Top 0.254: D7.4 -13,21 -11,22 D6.2
N$19
  Top 0.254: D8.4 -20,15 D7.2
N$20
  Top 0.254: D9.4 -24,7 D8.2
N$21
  Top 0.254: D13.4 -5,-25 -7,-24 D12.2
N$22
  Top 0.254: D5.4 7,24 D4.2
N$23
  Top 0.254: D20.2 50.2,-5 59.1,-5 D21.4
N$24
  Top 0.254: D19.2 41.2,0 50.1,0 D20.4
N$25
  Top 0.254: D19.4 D18.2
N$26
  Top 0.254: D18.4 D17.2
N$27
  Top 0.254: D23.4 -56.36,3.35 -59.75,6.74 -59.75,9.45 D22.2
N$28  (via drill 0.35)
  Top 0.254: D23.2 -51,4.2 -51,3 v-48,0 | v-46,-2 -44.8,-2 D24.4
  Bottom 0.254: v-48,0 v-46,-2
N$29  (via drill 0.35)
  Top 0.254: D25.4 v-51,-5 | D24.2 v-51,-3
  Bottom 0.254: v-51,-5 v-51,-3
N$30
  Top 0.254: D26.4 -58,-6 D25.2
N$31  (via drill 0.35)
  Top 0.254: v-56.6,2.6 -56.7,2.6 D22.4
  Bottom 0.254: U3.4 9.62,-54.83 -47.2,2 -56,2 v-56.6,2.6
N$32  (via drill 0.35)
  Top 0.305: v26,-53.6 20.6,-48.2 20.6,-20.8 33.4,-8 38.2,-8 v42.7,-3.5 | v48,1 53,1 60.1,8.1 60.1,9.9 61.85,11.65 D17.4
  Bottom 0.305: U2.4 26.05,-53.65 v26,-53.6 | v42.7,-3.5 47.2,1 v48,1
N$33
  Bottom 0.305: U4.4 68.11,39.89 67.5,40.5 R1.1 59.85,40.5 R2.2
N$34
  Bottom 0.305: C28.1 64.3,37.35 U4.1
N$35  (via drill 0.35)
  Top 0.305: -30.06,79.19 D28.A v-30,78.4
  Bottom 0.305: v-30,78.4 -30,77.77 R5.2
N$36
  Bottom 0.305: R6.2 -18.79,59.53 D29.A
N$37  (via drill 3 pad 5)
  other vias: 37.44,71.87
N$38  (via drill 3 pad 5)
  other vias: 23.31,79.39
N$45
  pour Bottom (no thermals): 66,-35 66,-37 62,-41 57.46,-41 57.01,-40.55 57.01,-36.25 55.55,-34.79 55.55,-31.49 55.7,-31.34 56.25,-31.34 56.36,-31.45 56.36,-32.71 58.14,-34.49 65.49,-34.49
N$46  (via drill 0.35)
  Top 0.305: D41.A 42.29,-62.46 v42.37,-62.55
  Bottom 0.254: R34.2 42.76,-62.55 v42.37,-62.55
N$52
  Bottom 0.254: D42.A 32.27,-78.31 R35.2
N$96
  Bottom 0.508: R43.1 R44.2 50.78,-36.15 U11.4
N$97
  Bottom 0.508: U11.1 56.15,-37.71 C34.1
O_IN
  Bottom 0.254: IC1.5 24.57,-78.77 Q26.1 27.57,-80.4 C42.1
O_IN_2
  Bottom 0.305: IC2.5 -25.24,63.36 -25.5,63.1 -25.5,60.5 -24.6,59.6 Q1.1 -23.38,60.23 C51.1
O_OUT
  Bottom 0.254: IC1.6 24.07,-76.53 22.6,-78 Q26.3 21.57,-78.22 C43.1
O_OUT_2
  Bottom 0.305: C52.1 -30.52,62 Q1.3 -27,62 -26,63 -26,63.71 -25.8,63.92 -25.8,63.95 -25.74,64 IC2.6
PC13
  Bottom 0.254: R35.1 29.98,-76.9 27.21,-76.9 26.07,-75.76 IC1.2
PC13_2
  Bottom 0.305: IC2.2 -23.74,64 -23.68,63.95 -23.68,63.92 -22.37,62.6 -21.1,62.6 -20.41,61.91 R6.1
RGB_5V  (via drill 0.35)
  Top 0.254: C1.1 D1.1 | C2.1 D2.1 | D3.1 C3.1 | C4.1 D4.1 | C5.1 -0.8,20.07 D5.1 | D6.1 C6.1 | C7.1 D7.1 | D8.1 C8.1 | C9.1 -20.07,-0.8 D9.1 | D10.1 C10.1 | C11.1 D11.1 | C12.1 D12.1 | C13.1 D13.1 | D14.1 C14.1 7.98,-18.1 | C15.1 D15.1 | C16.1 D16.1 | D21.1 C21.1 54.23,-9.22 v51,-6 | D19.1 C19.1 | D17.1 C17.1 D18.1 C18.1 D19.1 | v49,-4 49,-3.8 D20.1 C20.1 45.23,-4.22 v42,-1 | D19.1 40.4,0.8 v40.4,0.6 | D26.1 C26.1 D25.1 C25.1 D24.1 | C24.1 D24.1 | D22.1 C22.1 -54.02,9.22 v-50.6,5.8 | D24.1 v-41,0 | v-42,2 C23.1 D23.1 v-49,4
  Top 0.305: C8.1 -17.24,6.76 -14.41,9.59 C7.1 -12.41,13.59 -8.24,17.76 C6.1 -7.88,18 -7.06,18 -7.05,18 -7.04,18 -2.87,18 -0.8,20.07 | C5.1 1.23,18 6.12,18 C4.1 6.76,17.44 9.79,14.41 C3.1 13.59,12.41 17.76,8.24 C2.1 18,7.88 18,7.06 18,7.05 18,7.04 18,2 19.23,0.78 C1.1 18.64,-0.58 C16.1 17.24,-6.76 14.41,-9.59 C15.1 13,-13.59 C14.1 | 7.98,-18.1 7.38,-17.8 3.08,-18.6 C13.1 -0.58,-18.64 C12.1 -6.86,-17.74 -9.69,-14.91 C11.1 -13.59,-13 C10.1 -17.7,-7.58 -17.7,-3.17 -20.07,-0.8
  Top 0.406: v23.7,2.5 D1.1 | C19.1 37.45,0.73 v36.4,0.4 | v-36,-1 -37.27,-1 C24.1
  Bottom 0.254: v49,-4 v51,-6 | v40.4,0.6 v42,-1 | v-42,2 v-41,0 | v-50.6,5.8 -49,4.2 v-49,4
  Bottom 0.406: v36.4,0.4 35.8,-0.2 35.8,-3.1 | 35.8,-3.1 13.9,-3.1 8,-9 -6,-9 -14,-1 v-36,-1 | 35.8,-3.1 24.26,1.94 v23.7,2.5
  Bottom 0.813: S1.P$3 70,-25 66.55,-21.55 35.8,-3.1
RING
  Bottom 0.254: IC1.30 23.57,-58.57 23,-58 U1.2 23,-57.88 R13.1
RST  (via drill 0.35)
  Top 0.254: v17,-76.3 17.47,-76.77 v22.5,-76.77
  Bottom 0.254: C44.2 R32.1 15.36,-76.42 U$1.P$2 16.68,-75.98 v17,-76.3 | IC1.7 23.57,-76.16 22.96,-76.77 v22.5,-76.77
RST_2  (via drill 0.35)
  Top 0.305: v-26,67 -27,68 -29,68 -31,66 -31,65 -32,64 v-33,64
  Bottom 0.305: C53.2 -36.03,69.48 R3.1 -34.1,68.7 U$2.P$2 -33,66.4 v-33,64 | IC2.7 -26.24,66.76 v-26,67
RX1  (via drill 0.35)
  Top 0.254: v26.63,-71.02 35.98,-71.02 v36.4,-70.6
  Bottom 0.254: v36.4,-70.6 36.4,-70.08 J3.6 | IC1.43 v26.63,-71.02
RX1_2  (via drill 0.35)
  Top 0.254: v-19.5,69.5 -19.5,73.88 v-21,75.38
  Bottom 0.254: IC2.43 -20.25,68.75 v-19.5,69.5
  Bottom 0.305: v-21,75.38 -21.13,75.52 -21.13,77.07 J1.6
SCL1
  Bottom 0.305: IC2.45 -17.07,67.75 R9.2 -15.62,67.81 -8.8,61 6,61 13,54 19.86,54 COMPASS.4
SCL2  (via drill 0.35)
  Top 0.254: v25.7,-71.5 13.5,-71.5 v13,-71.5 | -18.32,-61.69 -41.3,-38.7
  Top 0.305: -41.3,-38.7 -59.3,-38.7 -69.8,-28.2 -69.8,-11.4 -66.4,-8 -66.4,-2.5 -67.63,-1.27 | -67.63,-1.27 TOF2.4 | -67.63,-1.27 -67.07,-1.27 v-66.4,-0.6 | v-1.5,53.3 -1.27,53.53 TOF4.4 | TOF3.4 67.27,1.27 66,0 66,-12 58,-20 26.32,-20 v25.8,-19.48 | v-1.95,-65.86 -6.12,-61.69 -18.32,-61.69 | v15,-49 1.27,-62.73 TOF1.4
  Bottom 0.254: R8.2 30.11,-71.39 29.48,-72.02 IC1.45 26.22,-72.02 v25.7,-71.5 | v13,-71.5 3.79,-71.5 TOF1.4 | -63,1.9 -58.7,1.9
  Bottom 0.305: TOF1.4 -1.86,-65.86 v-1.95,-65.86 | v-66.4,-0.6 -63.9,1.9 -63,1.9 | -58.7,1.9 -57,3.6 -57,9.4 -55.26,11.14 -23.96,11.14 -16.1,19 -16.1,38.7 v-1.5,53.3 | v25.8,-19.48 18.92,-19.48 16,-22.4 16,-48 v15,-49
SDA1
  Bottom 0.305: IC2.46 -20.25,67.25 -19.82,66.81 R10.2 -18.7,67.11 -16.31,67.11 -9.2,60 6,60 13,53 22.4,53 COMPASS.3
SDA2  (via drill 0.35)
  Top 0.254: v24.79,-72.16 12.16,-72.16 v3,-63
  Top 0.305: TOF2.3 -65.97,1.27 -65.35,0.65 -65.35,-8.05 -69,-11.7 -69,-28 -59,-38 -40.75,-38 -17.75,-61 -5.5,-61 -1.27,-65.23 | v1.4,57.4 1.3,57.5 1.3,68.7 TOF4.3 | v26.3,-18.5 27.1,-19.3 57.7,-19.3 64.6,-12.4 64.6,-2.4 v65,-2 | TOF1.3 -1.27,-65.23 | -1.27,-65.23 -1.27,-63.27 v1,-61 14,-48 v14.06,-48
  Bottom 0.254: R7.2 30.8,-72.52 IC1.46 25.15,-72.52 v24.79,-72.16 | v3,-63 v1,-61 | -59,3 -59.5,2.5 -67.49,2.5 TOF2.3
  Bottom 0.305: -59,3 -59,9 -56.3,11.7 -24.25,11.7 -16.8,19.15 -16.8,39.2 v1.4,57.4 | v65,-2 65.73,-1.27 TOF3.3 | v26.3,-18.5 18.3,-18.5 15,-21.8 15,-47 14.06,-47.94 v14.06,-48
SWCLK  (via drill 0.35)
  Top 0.254: v35.7,-66 33.7,-68 v29.8,-68
  Bottom 0.254: J3.2 35.77,-65.94 v35.7,-66 | v29.8,-68 29.28,-68.02 IC1.37
SWCLK_2  (via drill 0.35)
  Top 0.305: v-25.2,74.9 -25.2,72.9 v-23.3,71
  Bottom 0.305: v-25.2,74.9 -25.2,77.13 J1.2 | v-23.3,71 -23.3,71.11 -22.66,71.75 IC2.37
SWD_3V3_1
  Bottom 0.254: J3.4 38.78,-67.81 40.15,-66.45 C45.1
  Bottom 0.305: C45.1 41.44,-62.16 R34.1
SWD_3V3_2  (via drill 0.35)
  Top 0.254: v-23.3,75.7 -28.68,75.7 v-29,76.02
  Bottom 0.254: J1.4 -23.28,75.72 v-23.3,75.7
  Bottom 0.305: -28.98,76.02 v-29,76.02 -29.98,76.02 R5.1 -30.12,76.03 C54.1
SWDIO  (via drill 0.35)
  Top 0.254: v25.07,-64.92 26.85,-66.7 v34,-66.7 34.07,-66.7
  Bottom 0.254: J3.3 36.77,-66.88 36.6,-66.7 v34,-66.7 | v25.07,-64.92 25.07,-65.28 25.57,-65.78 IC1.34
SWDIO_2
  Bottom 0.305: J1.3 -24.24,77.17 IC2.34
TX1  (via drill 0.35)
  Top 0.254: v25.69,-70.5 25.83,-70.36 34.24,-70.36 v35.1,-69.5
  Bottom 0.254: v35.1,-69.5 35.85,-68.75 J3.5 | IC1.42 27.06,-70.52 26.9,-70.36 25.83,-70.36 v25.69,-70.5
TX1_2  (via drill 0.35)
  Top 0.254: v-22,75.38 -20.2,73.58 v-20.2,70.3
  Bottom 0.254: v-20.2,70.3 -20.2,69.6 -20.55,69.25 IC2.42
  Bottom 0.305: v-22,75.38 -22.13,75.52 -22.13,77.07 J1.5
VBAT  (1 unrouted)
XSHUT1  (1 unrouted)
XSHUT2  (1 unrouted)
XSHUT3  (1 unrouted)
XSHUT4  (1 unrouted)

## Text on the board
tPlace: 3v3 | gnd | gnd | 3v3 | k i d z | 0 | 337.5 | 22.5 | 315 | 45 | 292.5 | 67.5 | 3v3 | gnd | 270 | 90 | gnd | 3v3 | 247.5 | 112.5 | 225 | 135 | 202.5 | 157.5 | 180 | gnd | 5v | trèfle à quatre feuilles | 네 잎 클로버 | 四つ葉のクローバー | gnd | 3v3
bPlace: compass | rx2 | 12v | rx1 | tx1 | tx2 | gnd | bluetooth | on | off | JLCJLCJLCJLC